# Altium PCB MCU_USB1.PcbDoc
Units mm, origin at the board's own origin, x right, y up, seen from the top; angles counter-clockwise.
Board outline 48.77 x 23.12 mm, 4 copper layers (Top Layer, VCC, GND, Bottom Layer), stack 0.778 mm thick; 36 components, 33 nets, 152 pads, 185 vias.
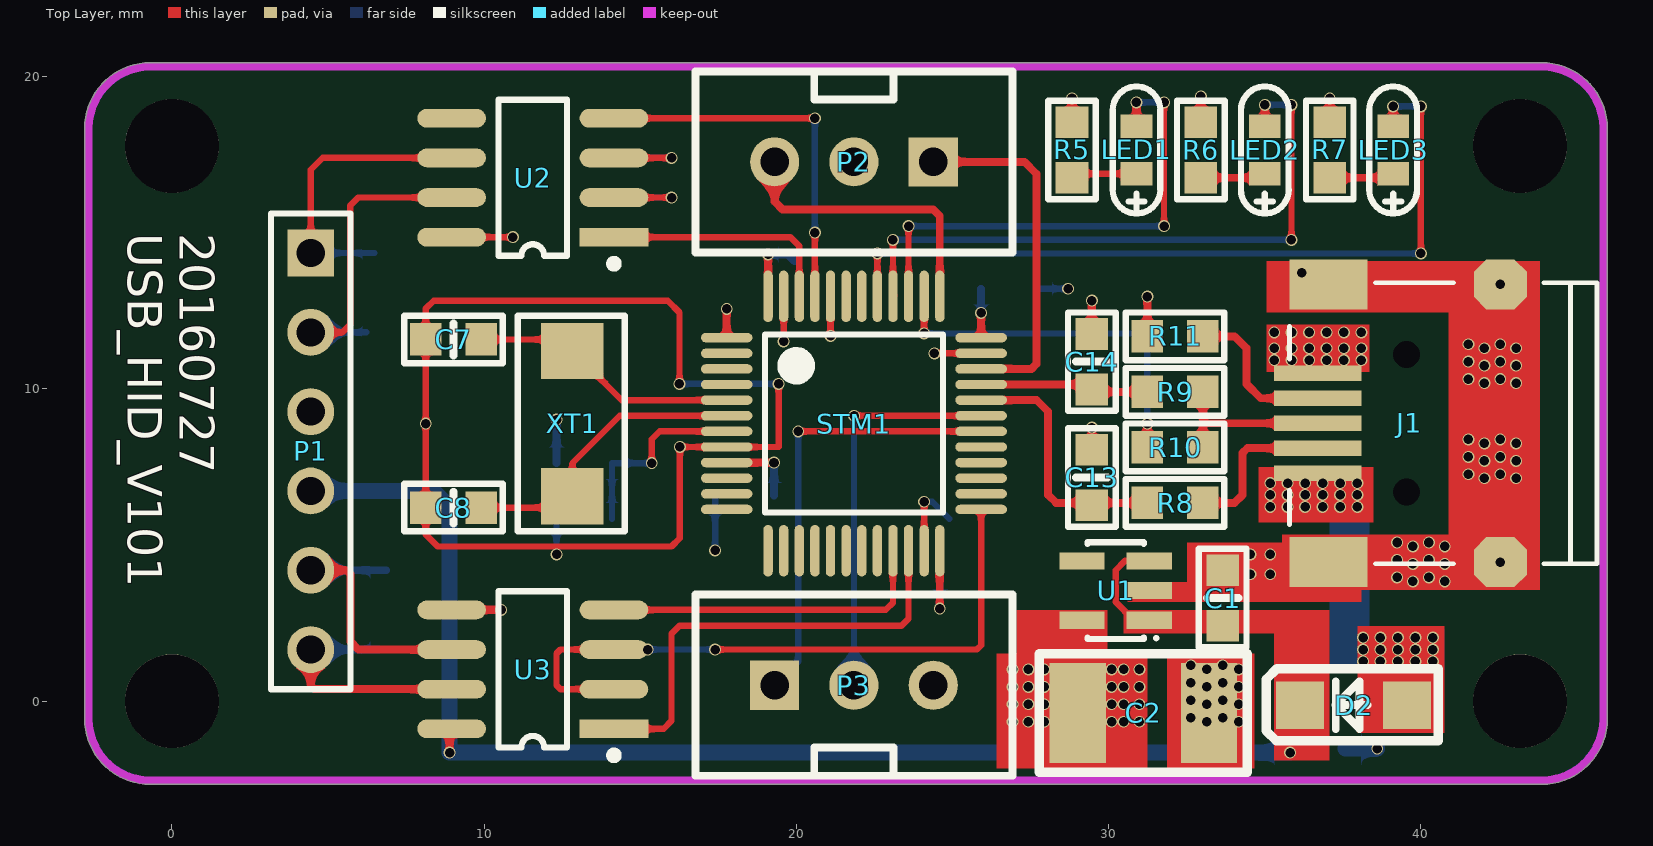
[diagram p0: Top Layer view]
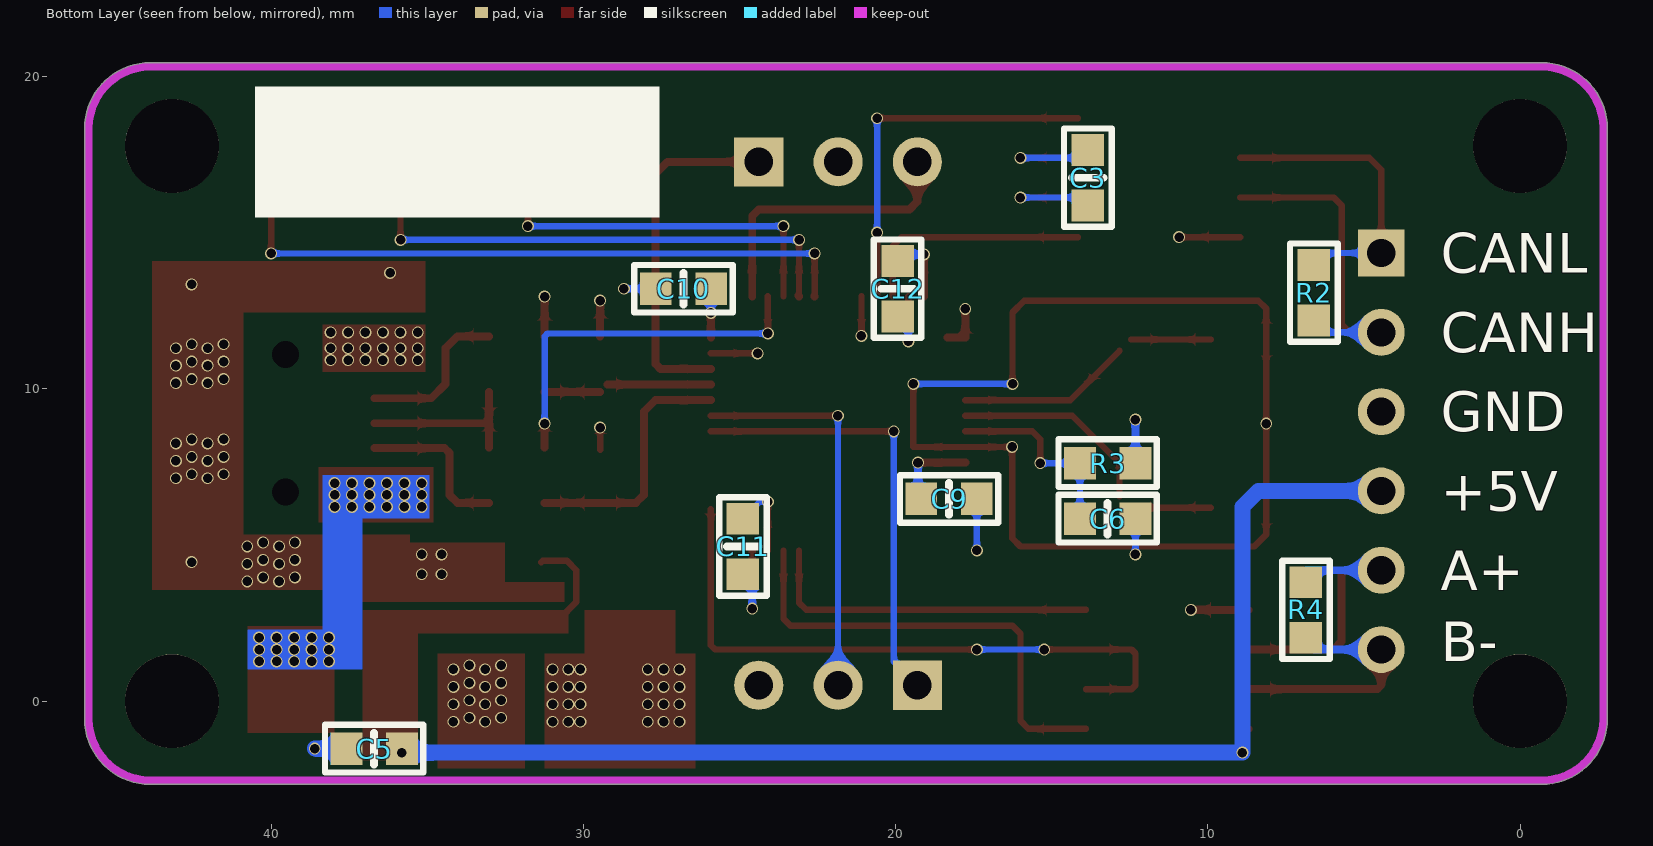
[diagram p1: Bottom Layer view, seen from below]
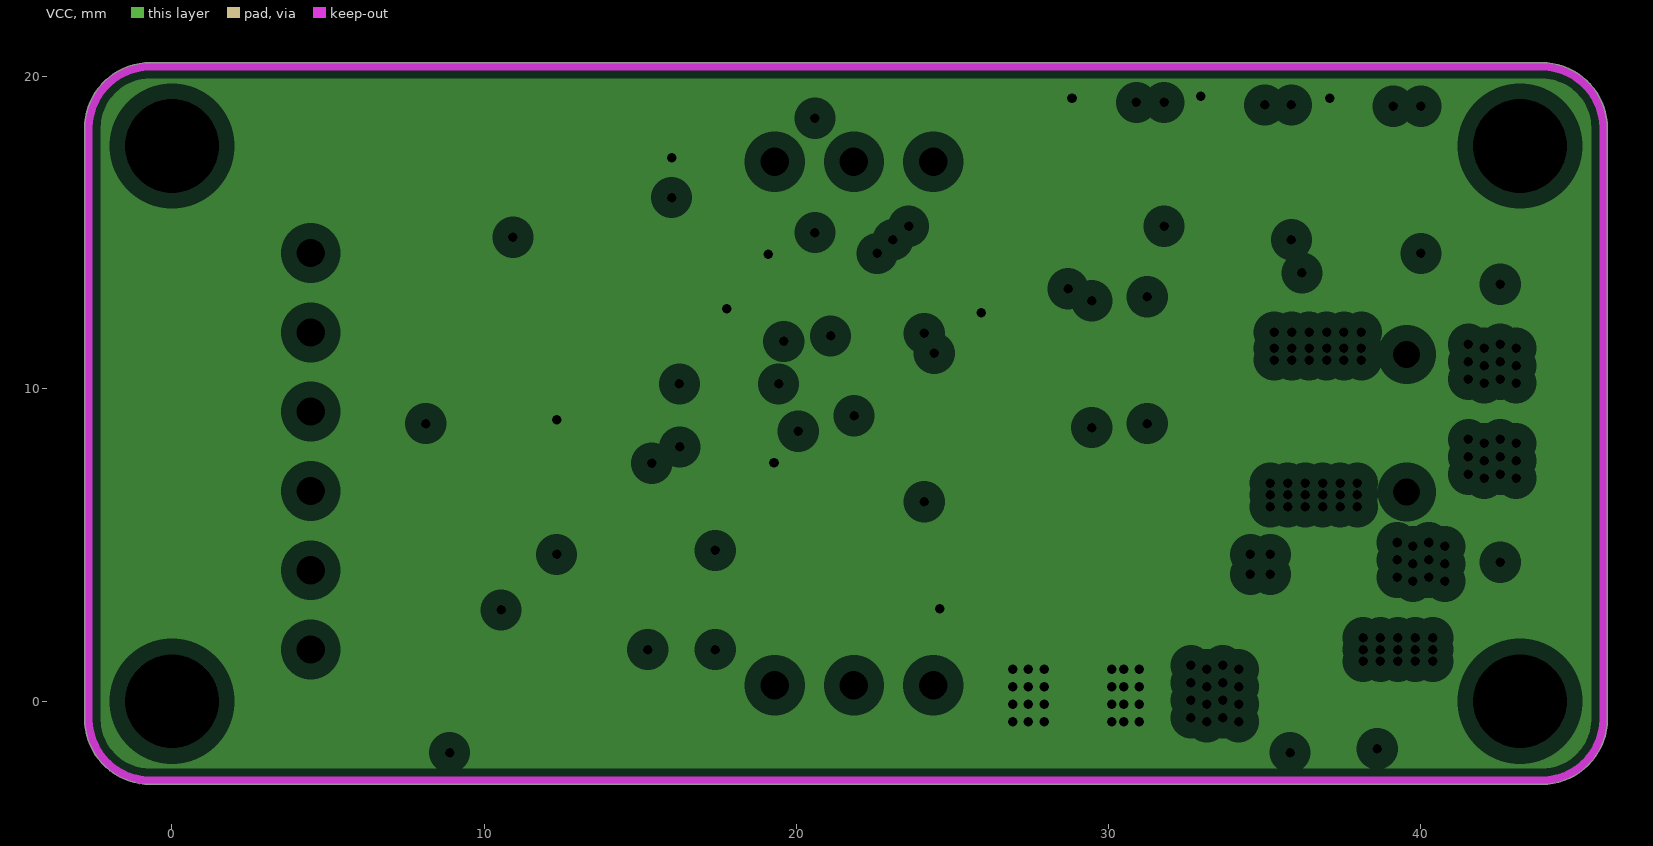
[diagram p2: VCC, clearances drawn from the general rule]
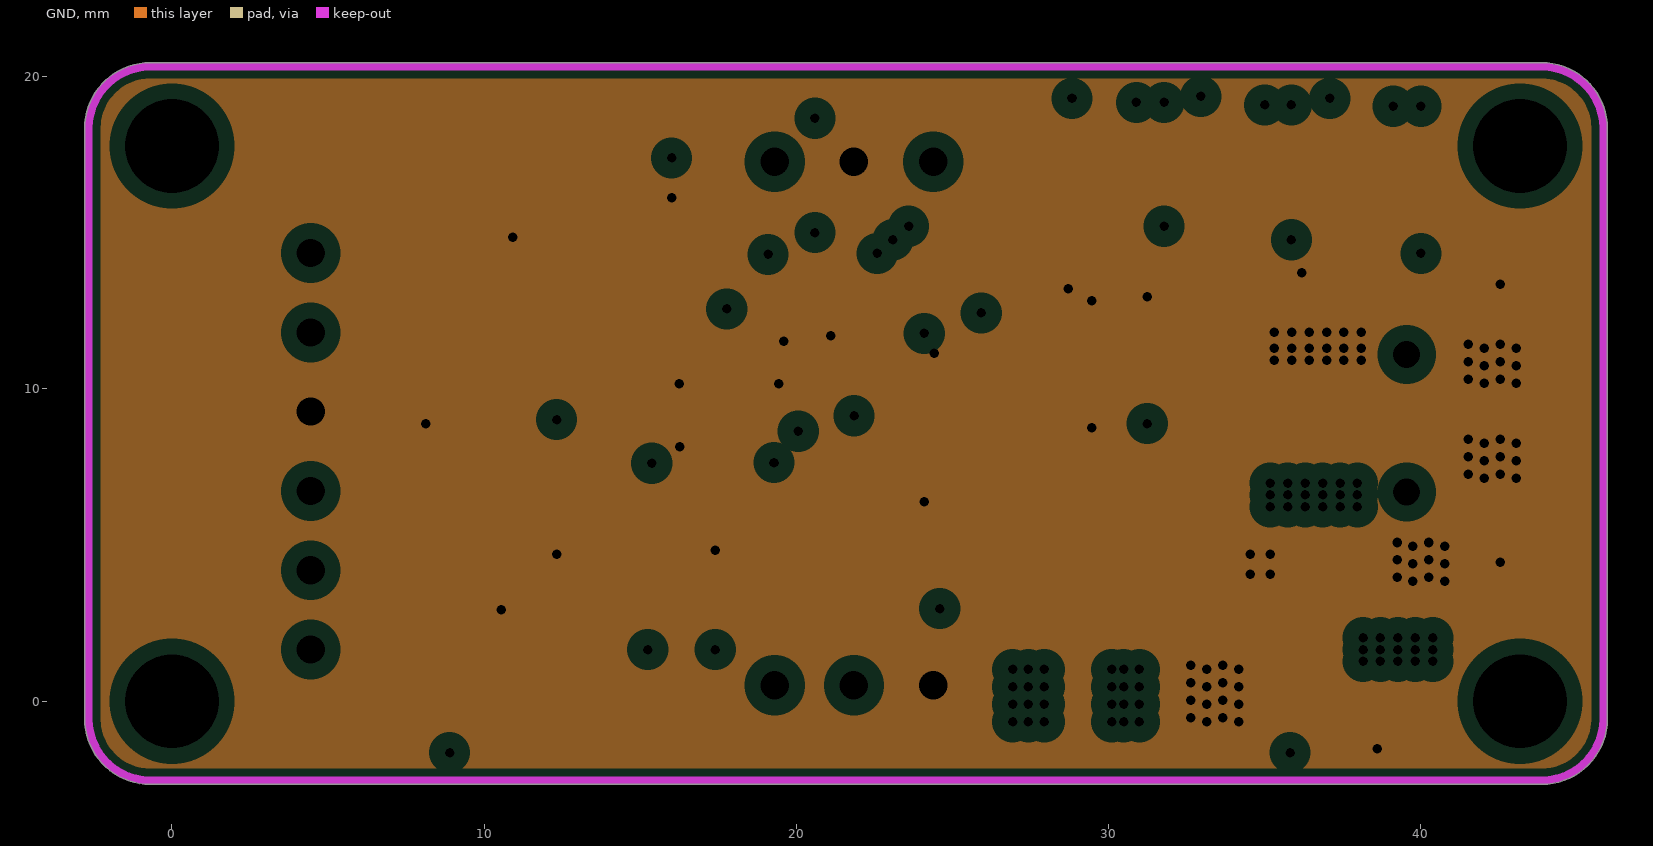
[diagram p3: GND, clearances drawn from the general rule]
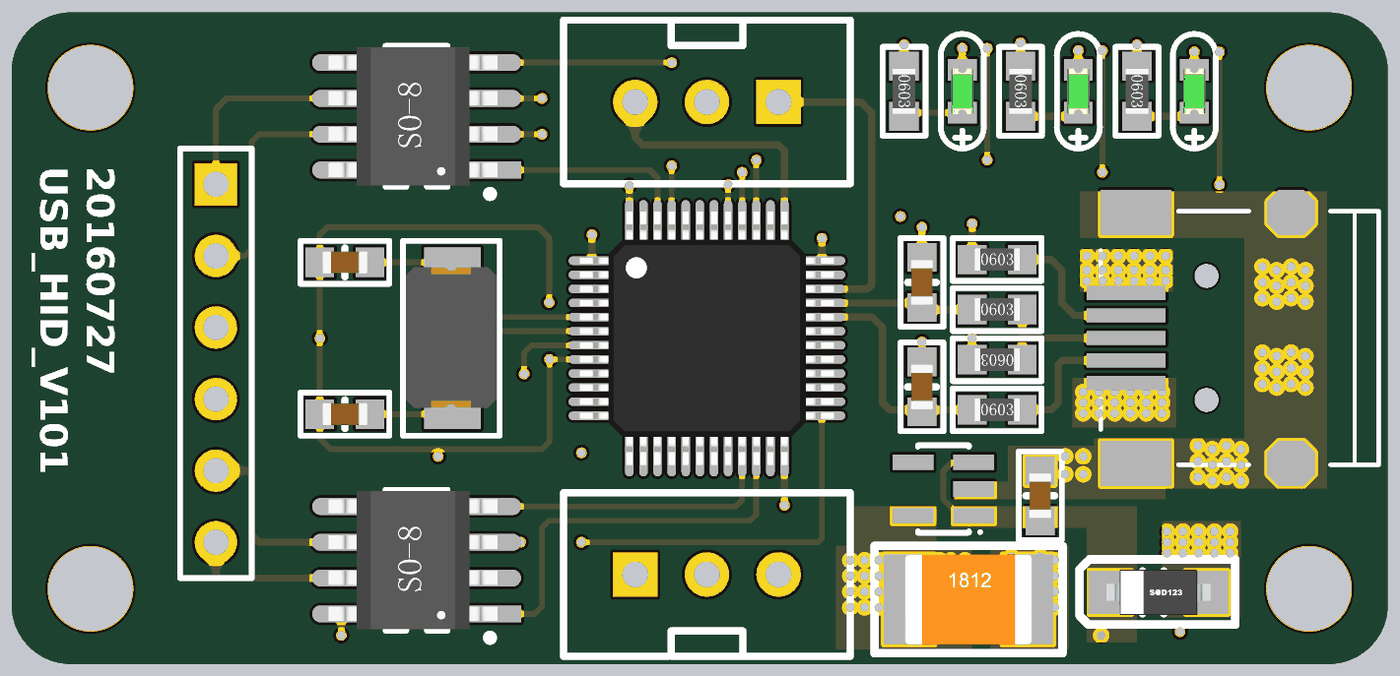
[diagram p4: 3D render of the assembled board from above, using the file's embedded part models]
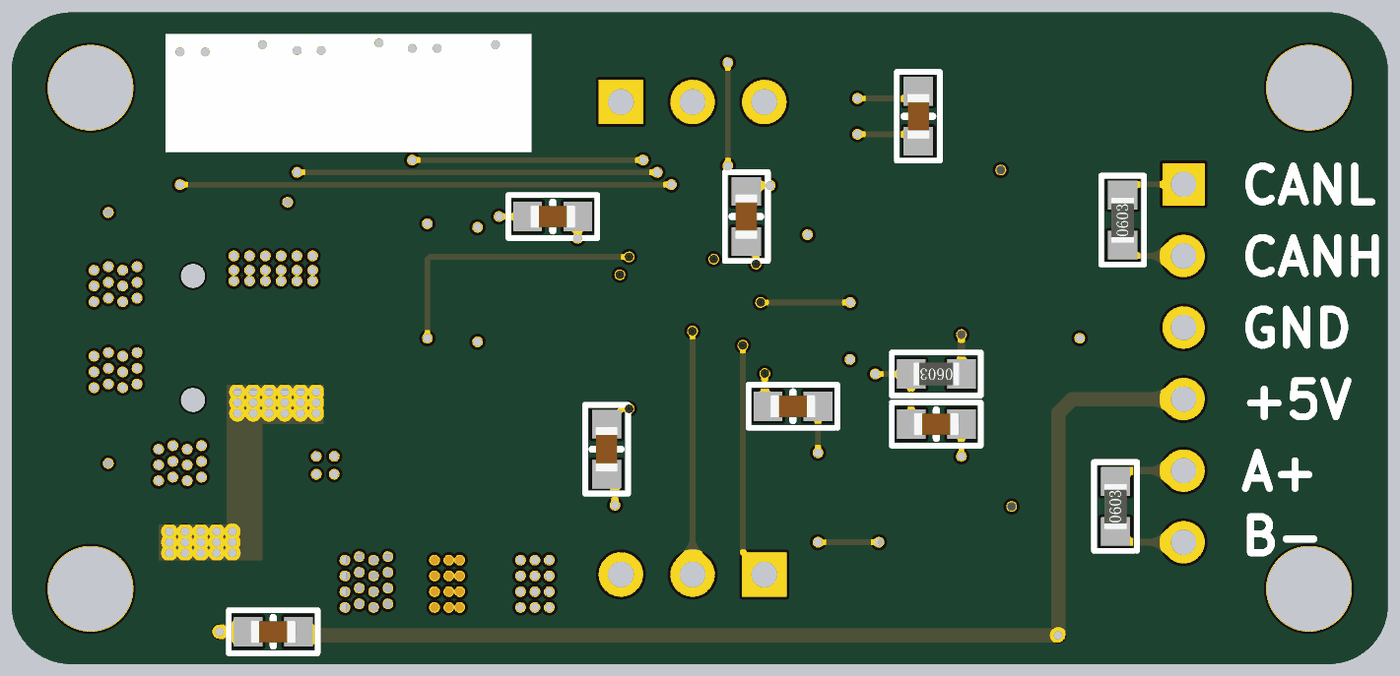
[diagram p5: 3D render of the assembled board from below, using the file's embedded part models]

## Layer stack, top to bottom
Top Solder: solder mask 0.0102, Solder Resist, Dk 3.5
Top Layer: signal copper 0.0356
Dielectric 1: core 0.254, FR-4, Dk 4.2
VCC: plane copper 0.036, net VCC_+3.3V
Dielectric 3: prepreg 0.127, Dk 4.2
GND: plane copper 0.036, net GND
Dielectric 2: core 0.254, Dk 4.2
Bottom Layer: signal copper 0.0356
Bottom Solder: solder mask 0.0102, Solder Resist, Dk 3.5

## Board outline
-2.795,-0.572 cw(c-2.668,-0.572) -2.791,-0.538 cw(c-2.667,-0.508) -2.794,-0.508 -2.794,18.335 cw(c-2.668,18.351) -2.795,18.351 cw(c-0.699,18.351) -0.699,20.448 cw(c-0.699,20.321) -0.682,20.447 43.878,20.447 cw(c43.878,18.35) 45.975,18.35 cw(c45.848,18.35) 45.974,18.334 45.974,-0.572 cw(c45.847,-0.572) 45.974,-0.572 ccw(c43.877,-0.572) 45.974,-0.572 cw(c43.877,-0.572) 43.877,-2.668 cw(c43.877,-2.541) 43.861,-2.667 -0.682,-2.667 cw(c-0.699,-2.541) -0.699,-2.668 cw(c-0.699,-0.572)

## Design rules (kind name [scope] priority, off if disabled: settings)
Clearance [All] p1 off: gap=0.254
ComponentClearance [All] p1: gap=0 collisioncheckmode=3 verticalgap=0 showdistances=FALSE
HoleSize [All] p1: absolutevalues=TRUE maxlimit=12.7 minlimit=0.025 maxpercent=80.000 minpercent=20.000
HoleToHoleClearance [All] p1: gap=0 allowstackedmicrovias=TRUE
MinimumSolderMaskSliver [All] p1: minsoldermaskwidth=0
PlaneClearance [All] p1: clearance=0.508
PlaneConnect [All] p1: planeconnectstyle=Direct reliefexpansion=0.508 reliefentries=4 reliefconductorwidth=0.254 reliefairgap=0.254
PolygonConnect PolygonConnect_1 [IsVia vs InNet('GND')] p1 off: connectstyle=Direct reliefconductorwidth=0.254 reliefentries=4 polygonreliefangle="90 Angle" airgapwidth=0.254
PolygonConnect PolygonConnect_2 [All] p2: connectstyle=Direct reliefconductorwidth=0.254 reliefentries=4 polygonreliefangle="90 Angle" airgapwidth=0.254
RoutingVias [All] p1: holewidth=0.711 width=1.27 viastyle="Through Hole" minholewidth=0.711 minwidth=1.27 maxholewidth=0.711 maxwidth=1.27
SilkToSilkClearance [All] p1: silktosilkclearance=0
SilkToSolderMaskClearance [IsPad] p1: minsilkscreentomaskgap=0 clearancetoexposedcopper=TRUE
SolderMaskExpansion [All] p1: expansion=0.102
Width [All] p1: maxlimit=7.62 minlimit=0.203 preferedwidth=0.203
22 further rules are at their usual default settings.

## Components (designator, comment, footprint, x,y, rotation, side; value= is the part's Value field where it differs from the comment)
C1 "0.1uF" 0603C 33.655,3.302 r270 top
C2 "10uF" 1812C 31.115,-0.381 r0 top
C3 "0.1uF" 0603C 13.843,16.764 r90 bottom
C5 "104" 0603C 36.703,-1.524 r180 bottom
C6 "Cap_0603" 0603C 13.208,5.842 r0 bottom
C7 "Cap_0603" 0603C 9.017,11.582 r0 top
C8 "Cap_0603" 0603C 9.017,6.198 r0 top
C9 "Cap_0603" 0603C 18.288,6.477 r0 bottom
C10 "Cap_0603" 0603C 26.797,13.208 r180 bottom
C11 "Cap_0603" 0603C 24.892,4.953 r270 bottom
C12 "Cap_0603" 0603C 19.939,13.208 r90 bottom
C13 "Cap_0603" 0603C 29.464,7.163 r90 top
C14 "Cap_0603" 0603C 29.464,10.871 r90 top
D2 "Diode 1N4148" 1206D 37.846,-0.127 r180 top
J1 "USB_mini" USB 39.624,8.9 r270 top locked
LED1 "LED" LED-0603 30.895,17.78 r90 top
LED2 "LED" LED-0603 35.005,17.78 r90 top
LED3 "LED" LED-0603 39.116,17.78 r90 top
P1 "Header 6" HDR1X6 4.445,14.351 r270 top
P2 "Header 3H" SIP3B 24.384,17.272 r180 top locked
P3 "Header 3H" SIP3B 19.304,0.508 r0 top locked
R2 "120R" 0603R 6.731,13.081 r270 bottom
R3 "Res_0603" 0603R 13.208,7.493 r180 bottom
R4 "120R" 0603R 6.985,2.921 r270 bottom
R5 "10K" 0603R 28.956,17.653 r90 top
R6 "10K" 0603R 33.084,17.653 r90 top
R7 "10K" 0603R 37.211,17.653 r90 top
R8 "Res_0603" 0603R 32.131,6.477 r180 top
R9 "Res_0603" 0603R 32.131,10.033 r180 top
R10 "Res_0603" 0603R 32.131,8.001 r0 top
R11 "Res_0603" 0603R 32.131,11.811 r180 top
STM1 "STM32F103C" STM32F_48 21.844,8.89 r0 top locked
U1 "SGM2019-3.3" SOT23-5 30.226,3.556 r90 top
U2 "SN65HVD230" SOP8 11.43,16.764 r180 top
U3 "SN75LBC184" SOP8 11.43,1.016 r180 top
XT1 "XTAL_5032" 5032SMD 12.827,8.89 r90 top

## Footprints (in the part's own frame and the unit in brackets; to place one, negate y for a bottom-side part, rotate by r counter-clockwise, add the part's x,y. Pads: shape width x height; smd on the part's side, far side on the other; paste and mask are expansions set on the pad)
0603C [mil]
  rect 40x41 smd: 1(-35,0) 2(35,0)
  silkscreen extent -62,-30 62,30, body extent -31,-16 32,16, height 24
0603R [mil]
  rect 40x41 smd: 1(35,5) 2(-35,5)
  silkscreen extent -62,-25 62,35, body extent -31,-11 31,21, height 18
1206D [mil] "1206-Diode"
  rect 60x60 smd: 1(-67.5,0) 2(67.5,0)
  silkscreen extent -107,-46 110,45, body extent -73,-31 73,32
1812C [mm]
  rect 1.8x3.2 smd: 1(-2.1,0) 2(2.1,0)
  silkscreen extent -3.33,-1.91 3.33,1.91, body extent -2.25,-1.6 2.25,1.6, height 1.6
5032SMD [mm]
  rect 1.8x2 smd: 1(2.328,0) 2(-2.328,0)
  silkscreen extent -3.45,-1.68 3.45,1.75, body extent -2.47,-1.55 2.53,1.65, height 1.35
HDR1X6 [mm] "Connector; Header; 6 Position"
  rect 1.5x1.5 hole 0.9: 1(0,0)
  round 1.5 hole 0.9: 2(2.54,0) 3(5.08,0) 4(7.62,0) 5(10.16,0) 6(12.7,0)
  silkscreen extent -1.27,-1.27 13.97,1.27
LED-0603 [mil]
  rect 30x40 smd: 1(-35,0) 2(25,0)
  silkscreen extent -85,-30 75,30, body extent -37,-16 27,16, height 24
SIP3B [mil]
  rect 62x62 hole 36: 1(0,0)
  round 62 hole 36: 2(100,0) 3(200,0)
  silkscreen extent -100,-114 300,114
SOP8 [mm]
  rect 2.2x0.6 smd: 1(-2.727,1.905)
  oval 2.2x0.6 smd: 2(-2.727,0.635) 3(-2.727,-0.635) 4(-2.727,-1.905) 5(2.473,-1.905) 6(2.473,-0.635) 7(2.473,0.635) 8(2.473,1.905)
  silkscreen extent -2.85,-2.5 0.97,2.88, body extent -3,-2.45 3,2.45, height 1.7
SOT23-5 [mm]
  rect 0.55x1.45 smd: 1(-0.966,-1.076) 2(-0.016,-1.076) 3(0.934,-1.076) 4(0.934,1.074) 5(-0.966,1.074)
  silkscreen extent -1.59,-1.35 1.53,0.9
STM32F_48 [mm] "TSQFP, 48-Leads, Body 9.0x9.0mm (max), Pitch 0.50mm, IPC Medium Density"
  oval 1.65x0.3 smd: 1(-4.075,2.75) 2(-4.075,2.25) 3(-4.075,1.75) 4(-4.075,1.25) 5(-4.075,0.75) 6(-4.075,0.25) 7(-4.075,-0.25) 8(-4.075,-0.75) 9(-4.075,-1.25) 10(-4.075,-1.75) 11(-4.075,-2.25) 12(-4.075,-2.75) 25(4.075,-2.75) 26(4.075,-2.25) 27(4.075,-1.75) 28(4.075,-1.25) 29(4.075,-0.75) 30(4.075,-0.25) 31(4.075,0.25) 32(4.075,0.75) 33(4.075,1.25) 34(4.075,1.75) 35(4.075,2.25) 36(4.075,2.75)
  oval 0.3x1.65 smd: 13(-2.75,-4.075) 14(-2.25,-4.075) 15(-1.75,-4.075) 16(-1.25,-4.075) 17(-0.75,-4.075) 18(-0.25,-4.075) 19(0.25,-4.075) 20(0.75,-4.075) 21(1.25,-4.075) 22(1.75,-4.075) 23(2.25,-4.075) 24(2.75,-4.075) 37(2.75,4.075) 38(2.25,4.075) 39(1.75,4.075) 40(1.25,4.075) 41(0.75,4.075) 42(0.25,4.075) 43(-0.25,4.075) 44(-0.75,4.075) 45(-1.25,4.075) 46(-1.75,4.075) 47(-2.25,4.075) 48(-2.75,4.075)
  silkscreen extent -2.85,-2.85 2.85,2.85, body extent -4.5,-4.5 4.5,4.5, height 1.59
USB [mm]
  round 0.8 hole 0.864 unplated: 0(-2.2,-0.075) 0(2.2,-0.075)
  rect 0.5x2.8 smd: 1(1.6,-2.925) 2(0.8,-2.925) 3(0,-2.925) 4(-0.8,-2.925) 5(-1.6,-2.925)
  rect 1.6x2.5 smd: MH1(4.45,-2.575) MH2(-4.45,-2.575)
  oct 1.6x1.7 smd: MH3(4.45,2.925) MH4(-4.45,2.925)
  silkscreen extent -4.5,-3.82 4.5,6.02

## Part data
C1 C3: library part Cap, "Capacitor"
C2: library part "Cap Pol", "Polarized Capacitor (Radial)"
C5: library part 0603C
C6 C7 C8 C9 C10 C11 C12 C13 C14: "Capacitor"
D2: "High Conductance Fast Diode"
J1: library part 0481900001, "USB On-The-Go (OTG) Mini-B Receptacle, Right Angle, SMT, 0.80mm (.031\") Pitch, Solder Tabs with Back Cover, Recessed Type"
LED1 LED2 LED3: "Typical INFRARED GaAs LED"
P1: "Header, 6-Pin"
P2 P3: "Header, 3-Pin, Right Angle"
R2 R4: library part RES2A
R3 R8 R9 R10 R11: "Resistor"
R5 R6 R7: library part Res2, "Resistor"
STM1: "MCU"
U1: library part SGM2019
U2: library part SN65HVD230D
XT1: "Crystal Oscillator"

## Free pads (board coordinates)
  round 3 hole 3: 0(0,0) 0(0,17.78) 0(43.18,0) 0(43.18,17.78)

## Via types
v1: diameter 0.381, hole 0.305, Top Layer to Bottom Layer, 185 vias

## Nets (pads, with @x,y where several pads share a name; then routed paths per layer and width w, separated by ;. In a path a pad name is that pad's centre, name@x,y a point inside that pad or via, vN(x,y) a via of type N, cw(c..) or ccw(c..) an arc to the next point about the centre after c; other vN are vias at no path point)
485_DIR: STM1.25 U3.2 U3.3 | length 20.7
  Top Layer w0.203: U3.2@13.903,0.381 12.446,0.381 12.319,0.508 12.319,1.524 12.446,1.651 13.903,1.651 v1(15.24,1.651) ; v1(17.399,1.651) 25.781,1.651 25.919,1.789 STM1.25
  Bottom Layer w0.203: v1(15.24,1.651) v1(17.399,1.651)
A+: P1.5 R4.2 U3.6 | length 9.2
  Top Layer w0.254: P1.5 5.588,4.191 5.715,4.064 5.715,1.905 5.969,1.651 U3.6
  Bottom Layer w0.254: P1.5 R4.2@6.858,4.191
B-: P1.6 R4.1 U3.7 | length 7.9
  Top Layer w0.254: P1.6 4.445,0.508 4.572,0.381 U3.7
  Bottom Layer w0.254: P1.6 R4.1@6.604,1.651
CAN_RXD1: STM1.45 U2.4 | length 12.1
  Top Layer w0.203: U2.4 v1(20.594,18.669) ; STM1.45 v1(20.594,15.006)
  Bottom Layer w0.203: v1(20.594,15.006) v1(20.594,18.669)
CAN_TXD1: STM1.46 U2.1 | length 7.7
  Top Layer w0.203: U2.1 19.812,14.859 20.094,14.577 STM1.46
CANH: P1.2 R2.1 U2.7 | length 10.3
  Top Layer w0.203: P1.2 5.461,11.811 5.715,12.065 5.715,15.875 5.969,16.129 U2.7
  Bottom Layer w0.203: P1.2 R2.1@6.223,11.811
CANL: P1.1 R2.2 U2.6 | length 9.4
  Top Layer w0.203: P1.1 4.445,17.018 4.826,17.399 U2.6
  Bottom Layer w0.203: P1.1 R2.2@6.477,14.351
D+: C14.1 R9.1 STM1.33 | length 5.1
  Top Layer w0.254: STM1.33 C14.1@29.23,10.14 ; C14.1@29.464,9.906 R9.1
D-: C13.1 R8.1 STM1.32 | length 8.2
  Top Layer w0.254: STM1.32 27.698,9.64 28.067,9.271 28.067,6.604 28.321,6.35 29.464,6.35 R8.1
GND: C1.1 C2.2 C3.1 C5.1 C6.1 C7.1 C8.1 C9.1 C10.1 C11.1 C12.1 C13.2 C14.2 J1.5 J1.MH1 J1.MH2 J1.MH3 J1.MH4 P1.3 P2.2 P3.3 R11.1 STM1.8 STM1.23 STM1.35 STM1.44 STM1.47 U1.2 U2.2 U2.8 U3.5 | length 60.5
  Top Layer w0.203: U2.8 v1(10.922,14.859) ; U2.2 v1(16.002,16.129) ; v1(16.256,10.16) 16.256,12.446 15.875,12.827 8.382,12.827 8.128,12.573 C7.1 C8.1 8.128,5.334 8.509,4.953 16.002,4.953 16.268,5.219 v1(16.268,8.14) STM1.8 19.419,8.14 19.431,8.152 v1(19.431,10.16) ; v1(19.594,11.521) STM1.47 ; v1(21.094,11.696) STM1.44 ; STM1.23 v1(24.094,6.386) ; v1(24.42,11.14) STM1.35 ; C13.2 v1(29.464,8.763)
  Top Layer w0.254: U3.5@8.703,2.921 v1(10.541,2.921) ; C14.2@29.464,11.684 v1(29.464,12.827) ; R11.1 v1(31.242,12.954)
  Bottom Layer w0.203: v1(12.319,4.699) C6.1 ; C3.1@13.97,16.129 v1(16.002,16.129) ; v1(16.256,10.16) v1(19.431,10.16) ; v1(17.399,4.826) C9.1 ; v1(19.594,11.521) C12.1@19.594,11.974 ; v1(24.094,6.386) 24.348,6.386 C11.1 ; C10.1 v1(28.702,13.208)
  Bottom Layer w0.508: C5.1 v1(38.608,-1.524)
  other v1: 33.147,-0.66 34.163,-0.66 32.639,-0.533 33.655,-0.533 33.147,-0.102 34.163,-0.102 32.639,0.025 33.655,0.025 33.147,0.457 34.163,0.457 32.639,0.584 33.655,0.584 33.147,1.016 34.163,1.016 32.639,1.143 33.655,1.143 39.751,3.835 40.767,3.835 39.243,3.962 40.259,3.962 34.544,4.064 35.179,4.064 39.751,4.394 40.767,4.394 42.549,4.45 39.243,4.521 40.259,4.521 34.544,4.699 35.179,4.699 39.751,4.953 40.767,4.953 39.243,5.08 40.259,5.08 42.037,7.137 43.053,7.137 41.529,7.264 42.545,7.264 42.037,7.696 43.053,7.696 41.529,7.823 42.545,7.823 42.037,8.255 43.053,8.255 41.529,8.382 42.545,8.382 8.128,8.89 42.037,10.185 43.053,10.185 41.529,10.312 42.545,10.312 42.037,10.744 43.053,10.744 41.529,10.871 42.545,10.871 35.306,10.922 35.865,10.922 36.424,10.922 36.982,10.922 37.541,10.922 38.1,10.922 35.306,11.303 35.865,11.303 36.424,11.303 36.982,11.303 37.541,11.303 38.1,11.303 42.037,11.303 43.053,11.303 41.529,11.43 42.545,11.43 35.306,11.811 35.865,11.811 36.424,11.811 36.982,11.811 37.541,11.811 38.1,11.811 42.549,13.35 36.195,13.716
LED_BLUE: LED3.2 STM1.41 | length 25
  Top Layer w0.203: STM1.41 v1(22.594,14.339) ; v1(40.005,14.339) v1(40.005,19.05)
  Top Layer w0.254: STM1.41 STM1.41@22.606,12.977 ; LED3.2 v1(39.116,19.05)
  Bottom Layer w0.203: v1(22.594,14.339) v1(40.005,14.339) ; v1(39.116,19.05) v1(40.005,19.05)
LED_GREEN: LED2.2 STM1.40 | length 20.5
  Top Layer w0.203: STM1.40 v1(23.094,14.775) v1@23.094,14.839 ; v1(35.857,14.775) v1@35.857,19.05
  Top Layer w0.254: STM1.40 STM1.40@23.114,12.985 ; LED2.2 v1(35.005,19.097)
  Bottom Layer w0.203: v1(23.094,14.775) v1(35.857,14.775) ; v1(35.005,19.097) v1(35.857,19.097)
LED_RED: LED1.2 STM1.39 | length 16
  Top Layer w0.203: STM1.39 v1(23.594,15.212) ; v1(31.778,15.212) v1(31.778,19.177)
  Top Layer w0.254: LED1.2 v1(30.895,19.177)
  Bottom Layer w0.203: v1(23.594,15.212) v1(31.778,15.212) ; v1(30.895,19.177) v1(31.778,19.177)
NetC4_2: U1.4
NetLED1_1: LED1.1 R5.2 | length 2.1
  Top Layer w0.203: R5.2 28.956,16.891 LED1.1
NetLED2_1: LED2.1 R6.2 | length 1.9
  Top Layer w0.254: R6.2 LED2.1@34.878,16.764
NetLED3_1: LED3.1 R7.2 | length 1.9
  Top Layer w0.254: R7.2 LED3.1@38.989,16.764
RD+: R10.2 STM1.38 | length 11.9
  Top Layer w0.203: v1(24.094,11.775) STM1.38
  Top Layer w0.254: R10.2 v1(31.242,8.89)
  Bottom Layer w0.203: v1(24.094,11.775) 31.151,11.775 31.242,11.684 v1(31.242,8.89)
RST: C6.2 R3.2 STM1.7 | length 6.3
  Top Layer w0.203: v1(15.367,7.62) 15.367,8.382 15.625,8.64 STM1.7
  Bottom Layer w0.203: C6.2 R3.2 v1(15.367,7.62)
RXD1: P3.2 STM1.31 | length 12.7
  Top Layer w0.203: v1(21.848,9.14) STM1.31
  Bottom Layer w0.203: P3.2 21.848,0.512 v1(21.848,9.14)
RXD3: STM1.22 U3.1 | length 15
  Top Layer w0.203: U3.1@13.903,-0.889 15.748,-0.889 16.002,-0.635 16.002,2.159 16.256,2.413 23.368,2.413 23.594,2.639 STM1.22
SWCLK: P2.3 STM1.37 | length 9.3
  Top Layer w0.254: P2.3 19.304,16.002 19.558,15.748 24.384,15.748 24.594,15.538 STM1.37
SWDIO: P2.1 STM1.34 | length 11.4
  Top Layer w0.254: P2.1 27.305,17.272 27.686,16.891 27.686,10.795 27.531,10.64 STM1.34
TXD1: P3.1 STM1.30 | length 14.3
  Top Layer w0.203: v1(20.062,8.64) STM1.30
  Bottom Layer w0.203: P3.1 20.062,1.266 v1(20.062,8.64)
TXD3: STM1.21 U3.4 | length 10.9
  Top Layer w0.203: U3.4@13.903,2.921 22.86,2.921 23.094,3.155 STM1.21
USB_DM: J1.2 R8.2 | length 5.2
  Top Layer w0.254: R8.2 34.036,6.35 34.29,6.604 34.29,7.945 34.445,8.1 J1.2
USB_DP: J1.3 R9.2 R10.1 | length 5.5
  Top Layer w0.254: R10.1 33.02,9.017 ; R9.2 33.02,9.017 ; J1.3 33.137,8.9 33.02,9.017
USB_ID: J1.4 R11.2 | length 5.2
  Top Layer w0.254: R11.2 34.036,11.684 34.417,11.303 34.417,10.16 34.877,9.7 J1.4
USB_VBUS: D2.1 J1.1
  other v1: 38.151,1.27 38.71,1.27 39.268,1.27 39.827,1.27 40.386,1.27 38.151,1.651 38.71,1.651 39.268,1.651 39.827,1.651 40.386,1.651 38.151,2.032 38.71,2.032 39.268,2.032 39.827,2.032 40.386,2.032 35.179,6.223 35.738,6.223 36.297,6.223 36.855,6.223 37.414,6.223 37.973,6.223 35.179,6.604 35.738,6.604 36.297,6.604 36.855,6.604 37.414,6.604 37.973,6.604 35.179,6.985 35.738,6.985 36.297,6.985 36.855,6.985 37.414,6.985 37.973,6.985
VCC_+3.3V: C2.1 C3.2 C9.2 C10.2 C11.2 C12.2 R3.1 R5.1 R6.1 R7.1 STM1.1 STM1.9 STM1.24 STM1.36 STM1.48 U1.5 U2.3 | length 18.3
  Top Layer w0.203: U2.3 v1(16.002,17.399)
  Top Layer w0.254: STM1.9 v1(19.284,7.64) ; v1(17.769,12.562) STM1.1 STM1.1@18.332,11.64 ; STM1.48 v1(19.094,14.307) ; v1(24.594,2.965) STM1.24 ; STM1.36 v1(25.919,12.435) ; R5.1 v1(28.829,19.304) ; R6.1 v1(32.956,19.367) ; R7.1 v1(37.084,19.304)
  Bottom Layer w0.203: C3.2@13.843,17.399 v1(16.002,17.399)
  Bottom Layer w0.254: R3.1 v1(12.319,9.017) ; v1(19.094,14.307) 19.729,14.307 C12.2 ; C9.2@19.284,6.584 v1(19.284,7.64) ; v1(24.594,2.965) C11.2@24.594,3.766 ; v1(25.919,12.435) C10.2@25.919,13.197
  other v1: 26.924,-0.66 27.432,-0.66 27.94,-0.66 30.099,-0.66 30.48,-0.66 30.988,-0.66 26.924,-0.102 27.432,-0.102 27.94,-0.102 30.099,-0.102 30.48,-0.102 30.988,-0.102 26.924,0.457 27.432,0.457 27.94,0.457 30.099,0.457 30.48,0.457 30.988,0.457 26.924,1.016 27.432,1.016 27.94,1.016 30.099,1.016 30.48,1.016 30.988,1.016
VCC_+5V: C1.2 C5.2 D2.2 P1.4 U1.1 U1.3 U3.8 | length 43.9
  Top Layer w0.203: U1.1 30.811,2.59 30.226,3.175 30.226,4.191 30.525,4.49 U1.3 U1.3@31.347,4.445
  Top Layer w0.254: U3.8@8.703,-0.889 8.89,-1.076 v1(8.89,-1.651)
  Bottom Layer w0.508: P1.4 8.382,6.731 8.89,6.223 v1(8.89,-1.651) v1(35.814,-1.651)
X1: C7.2 STM1.5 XT1.1 | length 8.2
  Top Layer w0.203: C7.2 XT1.1@12.463,11.582 ; XT1.1 14.405,9.64 STM1.5
X2: C8.2 STM1.6 XT1.2 | length 9.2
  Top Layer w0.203: C8.2 XT1.2@12.463,6.198 ; XT1.2 12.827,7.62 14.347,9.14 STM1.6
pads on no net: J1.0 STM1.2 STM1.3 STM1.4 STM1.10 STM1.11 STM1.12 STM1.13 STM1.14 STM1.15 STM1.16 STM1.17 STM1.18 STM1.19 STM1.20 STM1.26 STM1.27 STM1.28 STM1.29 STM1.42 STM1.43 U2.5

## Polygon pours and split planes (outlines as drawn)
VCC_+3.3V on VCC (split plane): 45.467,18.362 45.466,18.35 45.465,18.35 45.466,18.366
VCC_+3.3V on VCC (split plane): -0.699,19.939 -0.699,19.938 -0.696,19.938 -0.682,19.937 43.878,19.937 43.894,19.938 44.056,19.929 44.232,19.9 44.403,19.85 44.568,19.782 44.724,19.696 44.869,19.593 45.002,19.474 45.121,19.341 45.224,19.196 45.31,19.04 45.378,18.875 45.428,18.704 45.457,18.528 45.465,18.399 45.454,18.401 45.433,18.35 45.465,18.35 45.465,18.348 45.464,18.334 45.464,-0.569 45.433,-0.569 45.432,-0.572 45.464,-0.572 45.465,-0.588 45.456,-0.749 45.427,-0.925 45.377,-1.096 45.309,-1.261 45.223,-1.417 45.12,-1.562 45.001,-1.695 44.868,-1.814 44.723,-1.917 44.567,-2.003 44.402,-2.071 44.231,-2.121 44.055,-2.15 43.926,-2.158 43.928,-2.147 43.877,-2.126 43.877,-2.158 43.893,-2.159 43.889,-2.16 43.877,-2.159 43.877,-2.158 43.875,-2.158 43.861,-2.157 -0.682,-2.157 -0.696,-2.158 -0.699,-2.158 -0.699,-2.159 -0.71,-2.16 -0.714,-2.159 -0.699,-2.158 -0.699,-2.126 -0.749,-2.147 -0.747,-2.158 -0.876,-2.15 -1.052,-2.121 -1.223,-2.071 -1.388,-2.003 -1.544,-1.917 -1.689,-1.814 -1.822,-1.695 -1.941,-1.562 -2.044,-1.417 -2.13,-1.261 -2.198,-1.096 -2.248,-0.925 -2.277,-0.749 -2.283,-0.644 -2.253,-0.572 -2.284,-0.572 -2.28,-0.538 -2.283,-0.508 -2.252,-0.508 -2.284,-0.432 -2.284,18.335 -2.285,18.349 -2.285,18.351 -2.253,18.351 -2.274,18.402 -2.285,18.4 -2.277,18.529 -2.248,18.705 -2.198,18.876 -2.13,19.041 -2.044,19.197 -1.941,19.342 -1.822,19.475 -1.689,19.594 -1.544,19.697 -1.388,19.783 -1.223,19.851 -1.052,19.901 -0.876,19.93 -0.747,19.938 -0.749,19.927 -0.699,19.906 -0.699,19.938 -0.714,19.939 -0.71,19.94
VCC_+3.3V on VCC (split plane): -2.285,18.351 -2.286,18.351 -2.287,18.363 -2.286,18.367
GND on GND (split plane): 45.467,18.362 45.466,18.35 45.465,18.35 45.466,18.366
GND on GND (split plane): -0.699,19.939 -0.699,19.938 -0.696,19.938 -0.682,19.937 43.878,19.937 43.894,19.938 44.056,19.929 44.232,19.9 44.403,19.85 44.568,19.782 44.724,19.696 44.869,19.593 45.002,19.474 45.121,19.341 45.224,19.196 45.31,19.04 45.378,18.875 45.428,18.704 45.457,18.528 45.465,18.399 45.454,18.401 45.433,18.35 45.465,18.35 45.465,18.348 45.464,18.334 45.464,-0.569 45.433,-0.569 45.432,-0.572 45.464,-0.572 45.465,-0.588 45.456,-0.749 45.427,-0.925 45.377,-1.096 45.309,-1.261 45.223,-1.417 45.12,-1.562 45.001,-1.695 44.868,-1.814 44.723,-1.917 44.567,-2.003 44.402,-2.071 44.231,-2.121 44.055,-2.15 43.926,-2.158 43.928,-2.147 43.877,-2.126 43.877,-2.158 43.893,-2.159 43.889,-2.16 43.877,-2.159 43.877,-2.158 43.875,-2.158 43.861,-2.157 -0.682,-2.157 -0.696,-2.158 -0.699,-2.158 -0.699,-2.159 -0.71,-2.16 -0.714,-2.159 -0.699,-2.158 -0.699,-2.126 -0.749,-2.147 -0.747,-2.158 -0.876,-2.15 -1.052,-2.121 -1.223,-2.071 -1.388,-2.003 -1.544,-1.917 -1.689,-1.814 -1.822,-1.695 -1.941,-1.562 -2.044,-1.417 -2.13,-1.261 -2.198,-1.096 -2.248,-0.925 -2.277,-0.749 -2.283,-0.644 -2.253,-0.572 -2.284,-0.572 -2.28,-0.538 -2.283,-0.508 -2.252,-0.508 -2.284,-0.432 -2.284,18.335 -2.285,18.349 -2.285,18.351 -2.253,18.351 -2.274,18.402 -2.285,18.4 -2.277,18.529 -2.248,18.705 -2.198,18.876 -2.13,19.041 -2.044,19.197 -1.941,19.342 -1.822,19.475 -1.689,19.594 -1.544,19.697 -1.388,19.783 -1.223,19.851 -1.052,19.901 -0.876,19.93 -0.747,19.938 -0.749,19.927 -0.699,19.906 -0.699,19.938 -0.714,19.939 -0.71,19.94
GND on GND (split plane): -2.285,18.351 -2.286,18.351 -2.287,18.363 -2.286,18.367

## Keep-outs
Keep-Out Layer:
  lines w0.254: -2.668,-0.572 ccw(c-0.699,-0.572) -0.699,-2.541 ; -2.668,18.351 cw(c-0.699,18.351) -0.699,20.321 ; -2.667,-0.508 -2.667,18.351 ; -0.699,-2.54 43.877,-2.54 ; -0.699,20.32 43.878,20.32 cw(c43.878,18.35) 45.848,18.35 ; 43.877,-2.541 ccw(c43.877,-0.572) 45.847,-0.572 45.847,18.35

## Other copper
Top Layer:
  rectangle net VCC_+3.3V: 26.416,-2.159 31.242,1.524
  rectangle net GND: 31.877,-2.159 34.671,1.524
  rectangle net VCC_+3.3V: 27.051,1.397 29.972,2.921
  rectangle net VCC_+5V: 30.48,2.159 37.084,2.921
  rectangle net VCC_+5V: 35.306,-1.905 37.084,2.794
  rectangle net GND: 35.052,10.541 38.354,12.065
  rectangle net GND: 35.052,12.446 43.815,14.097
  rectangle net GND: 40.894,3.556 43.815,14.097
  rectangle net GND: 35.56,3.556 43.815,5.334
  rectangle net USB_VBUS: 34.798,5.715 38.481,7.493
  rectangle net USB_VBUS: 37.973,-1.016 40.767,2.413
  rectangle net GND: 32.512,3.556 36.957,5.08
  rectangle net GND: 30.607,3.175 38.1,3.81
Bottom Layer:
  rectangle net USB_VBUS: 34.925,5.842 38.354,7.239
  rectangle net USB_VBUS: 37.084,1.016 38.354,6.858
  rectangle net USB_VBUS: 37.338,1.016 40.767,2.286

## Silkscreen, mask and mechanical layers (free items; w line width, h text height)
Top Overlay:
  text "USB_HID_V101" at -1.778,14.986 h1.91 r270
  text "20160727" at -0.127,14.986 h1.91 r270
Bottom Overlay:
  rectangle: 27.559,15.494 40.513,19.685
  text "CANL" at 2.54,13.716 h1.27
  text "CANH" at 2.54,11.176 h1.27
  text "GND" at 2.54,8.636 h1.27
  text "+5V" at 2.54,6.096 h1.27
  text "A+" at 2.54,3.556 h1.27
  text "B-" at 2.54,1.27 h1.27